# EAGLE board ioboard (EAGLE 9.6.2)
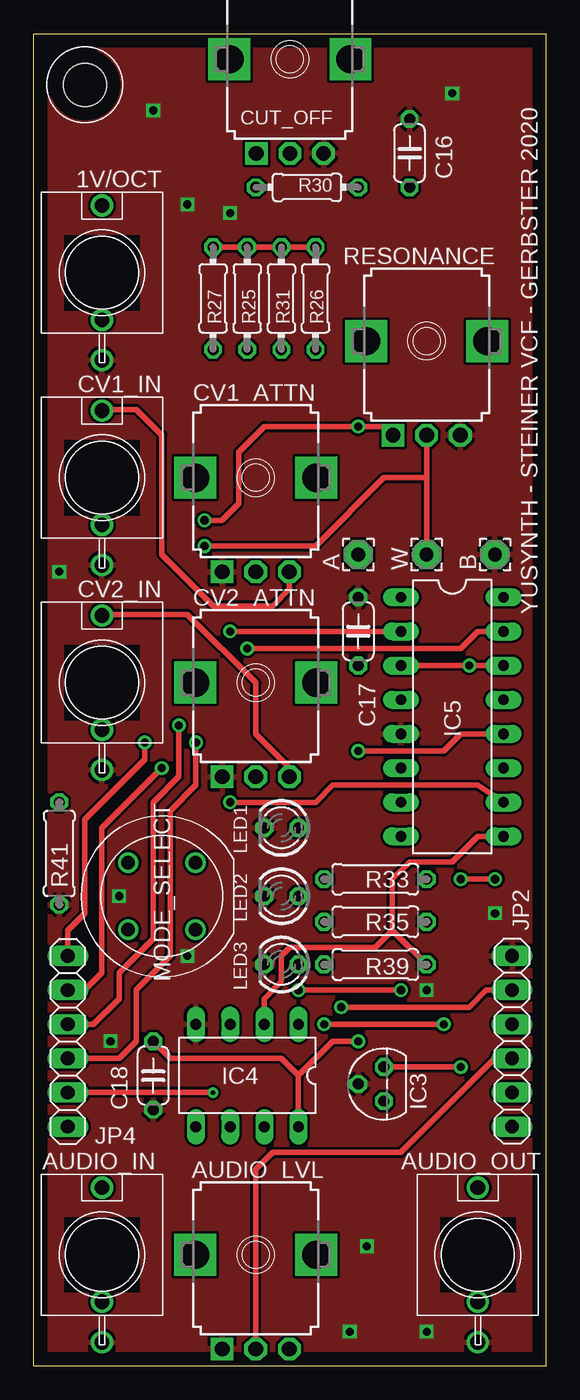
[diagram p0: board, top side]
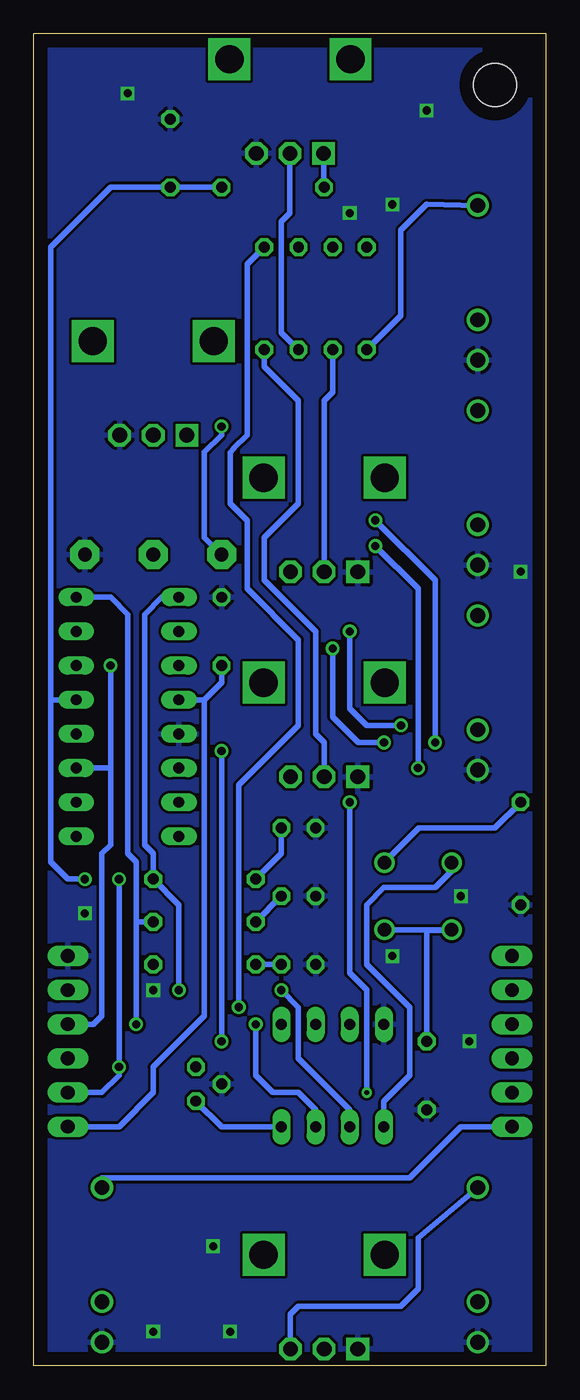
[diagram p1: board, bottom side, seen from below]

Size 38.1 x 99.06 mm. Coordinates in mm from the lower left corner, seen from the top.
Outline: 0,0 0,99.06 38.1,99.06 38.1,0 0,0
Copper layers (1*16): Top 0.035mm / dielectric 1.5mm / Bottom 0.035mm
Design rules "default": minimum track width 10mil, minimum drill 24mil, track to track 8mil, track to pad 8mil, pad to pad 8mil, via to via 8mil, smd to smd 8mil, copper to edge 40mil, drill to drill 8mil, minimum pad ring 10mil, minimum via ring 8mil, stop-mask expansion 4mil, vias tented up to drill 0mil, thermal gap 10mil
Holes 3.2 mm at 3.81,95.25

## Footprints (pad centres in the part's own frame; a part is rotated, then mirrored left to right if it is on the bottom)
WQP-PJ301M-12_JACK = drill 1.1: P$1 0,5; P$2 0,-3.5; P$3 0,-6.5
2,15/1,0 = drill 1.016 pad 2.159 octagon: 1 0,0
EVUF = drill 1.1 pad 1.676 square: 1 -2.5,-7 | drill 1.1 pad 1.676 octagon: 2 0,-7; 3 2.5,-7 | drill 2.1 pad 2.8 square: M1 4.5,0; M2 -4.5,0
C050-024X044 = drill 0.813 octagon: 1 -2.54,0; 2 2.54,0
TO92 = drill 0.813 octagon: 1 -1.27,0; 2 0,1.905; 3 1.27,0
DIL08 = drill 0.813 long: 1 -3.81,-3.81; 2 -1.27,-3.81; 3 1.27,-3.81; 4 3.81,-3.81; 5 3.81,3.81; 6 1.27,3.81; 7 -1.27,3.81; 8 -3.81,3.81
DIL16 = drill 0.813 long: 1 -8.89,-3.81; 2 -6.35,-3.81; 3 -3.81,-3.81; 4 -1.27,-3.81; 5 1.27,-3.81; 6 3.81,-3.81; 7 6.35,-3.81; 8 8.89,-3.81; 9 8.89,3.81; 10 6.35,3.81; 11 3.81,3.81; 12 1.27,3.81; 13 -1.27,3.81; 14 -3.81,3.81; 15 -6.35,3.81; 16 -8.89,3.81
1X06 = drill 1.016 long: 1 -6.35,0; 2 -3.81,0; 3 -1.27,0; 4 1.27,0; 5 3.81,0; 6 6.35,0
LED3MM = drill 0.813 octagon: A -1.27,0; K 1.27,0
D6-BTN = drill 1: A1 -2.5,2.5; A2 -2.5,-2.5; B1 2.5,2.5; B2 2.5,-2.5
0204/7 = drill 0.813 octagon: 1 -3.81,0; 2 3.81,0
0207/7 = drill 0.813 octagon: 1 -3.81,0; 2 3.81,0

## Placement (x,y rotation side)
1V/OCT  [WQP-PJ301M-12_JACK]  5.08,81.28 0 top
A  [2,15/1,0]  24.13,60.33 90 top
AUDIO_IN  [WQP-PJ301M-12_JACK]  5.08,8.26 0 top
AUDIO_LVL  50k log  [EVUF]  16.51,8.26 0 top
AUDIO_OUT  [WQP-PJ301M-12_JACK]  33.02,8.26 0 top
B  [2,15/1,0]  34.29,60.33 90 top
C16  .1uf  [C050-024X044]  27.94,90.17 90 top
C17  .1uf  [C050-024X044]  24.13,54.61 90 top
C18  .1uf  [C050-024X044]  8.89,21.59 270 top
CUT_OFF  50k lin  [EVUF]  19.05,97.16 0 top
CV1_ATTN  50k lin  [EVUF]  16.51,66.04 0 top
CV1_IN  [WQP-PJ301M-12_JACK]  5.08,66.04 0 top
CV2_ATTN  50k lin  [EVUF]  16.51,50.8 0 top
CV2_IN  [WQP-PJ301M-12_JACK]  5.08,50.8 0 top
IC3  78L05Z  [TO92]  26.04,20.95 90 top
IC4  TINY22P  [DIL08]  15.88,21.59 180 top
IC5  ADG412N  [DIL16]  31.11,48.26 270 top
JP2  [1X06]  35.56,24.13 270 top
JP4  [1X06]  2.54,24.13 90 top
LED1  [LED3MM]  18.41,40.01 180 top
LED2  [LED3MM]  18.41,34.92 180 top
LED3  [LED3MM]  18.41,29.84 180 top
MODE_SELECT  D6-BTN  [D6-BTN]  9.53,34.92 90 top
R25  220k  [0204/7]  15.88,79.38 270 top
R26  220k  [0204/7]  20.95,79.38 270 top
R27  220k  [0204/7]  13.34,79.38 270 top
R30  47k  [0204/7]  20.32,87.63 0 top
R31  150k  [0204/7]  18.41,79.38 270 top
R33  560R  [0207/7]  25.4,36.2 0 top
R35  560R  [0207/7]  25.4,33.02 0 top
R39  560R  [0207/7]  25.4,29.84 0 top
R41  10k  [0207/7]  1.91,38.1 90 top
RESONANCE  100k lin  [EVUF]  29.21,76.2 0 top
W  [2,15/1,0]  29.21,60.33 90 top

## Library data of the parts
1V/OCT AUDIO_IN AUDIO_OUT CV1_IN CV2_IN = thonkiconn
A B W = wirepad
AUDIO_LVL CUT_OFF CV1_ATTN CV2_ATTN RESONANCE = TomW
C16-C18 R25-R27 R30 R31 R33 R35 R39 R41 = resistor
IC3 = linear
IC4 = avr-7
IC5 = analog-devices; MF: ALTERA CORPORATION; MPN: ADG412TQ; OC_FARNELL: 1438704; OC_NEWARK: 09B7025
JP2 JP4 = pinhead
LED1-LED3 = led
MODE_SELECT = gerbster

## Nets
+12V: C16.1 IC3.3 IC5.13 JP2.5 R30.2
-12V: C17.1 IC5.4 JP2.6
GND: 1V/OCT.P$3 AUDIO_IN.P$3 AUDIO_LVL.1 AUDIO_OUT.P$3 B.1 C16.2 C17.2 C18.2 CUT_OFF.3 CV1_ATTN.1 CV1_IN.P$3 CV2_ATTN.1 CV2_IN.P$3 IC3.2 IC4.4 IC5.5 JP2.1 LED1.K LED2.K LED3.K R41.1 RESONANCE.3
IO_A: IC4.6 IC5.1 R33.2
IO_AUDIO_IN: AUDIO_LVL.2 JP2.4
IO_AUDIO_OUT: AUDIO_OUT.P$1 JP4.1
IO_B: IC4.7 IC5.16 R35.2
IO_BP_IN: IC5.15 JP4.3
IO_CV_IN: JP2.2 R25.1 R26.1 R27.1 R31.1
IO_HP_IN: IC5.10 JP4.2
IO_LP_IN: IC5.2 JP4.4
IO_RES_A: A.1 JP4.6 RESONANCE.1
IO_RES_B: JP4.5 RESONANCE.2 W.1
IO_SELECT_IN: IC5.3 IC5.11 IC5.14 JP2.3
N$31: MODE_SELECT.B2 R41.2
N$32: C18.1 IC3.1 IC4.8 IC5.12 MODE_SELECT.A1 MODE_SELECT.A2
N$33: IC4.2 IC5.9 R39.2
N$36: AUDIO_IN.P$1 AUDIO_LVL.3
N$37: LED1.A R33.1
N$38: CV1_ATTN.2 R25.2
N$39: CV2_ATTN.2 R26.2
N$40: CV1_ATTN.3 CV1_IN.P$1
N$42: LED2.A R35.1
N$44: LED3.A R39.1
N$45: CV2_ATTN.3 CV2_IN.P$1
N$46: IC4.5 MODE_SELECT.B1
N$54: CUT_OFF.1 R30.1
N$55: 1V/OCT.P$1 R27.2
N$56: CUT_OFF.2 R31.2

## Tracks (layer width: path | path; a pad name or v marks a point on that pad's centre or on a via)
+12V  (via drill 0.61)
  Top 0.406: v34.29,36.2 v31.75,36.2 | IC3.3 v31.75,22.23
  Bottom 0.406: R30.2 C16.1 32.38,87.63 36.83,83.19 36.83,49.53 | 36.83,49.53 36.83,37.47 35.56,36.2 v34.29,36.2 | v31.75,36.2 v31.75,22.23 31.75,21.59 33.02,20.32 JP2.5 | IC5.13 36.83,49.53
-12V
  Bottom 0.406: IC5.4 25.4,49.53 | 25.4,49.53 25.4,26.04 29.21,22.23 29.21,20.32 31.75,17.78 JP2.6 | C17.1 24.13,50.8 25.4,49.53
GND  (via drill 0.6)
  other vias: 34.29,33.66 24.77,8.89 29.21,27.94 29.21,2.54 11.43,30.48 5.71,24.13 6.35,34.92 31.11,94.61 8.89,93.34 11.43,86.36 14.61,85.72 1.91,59.05 23.5,2.54
  pour Bottom: 0,0 38.1,0 38.1,99.06 0,99.06
  pour Top: 0,0 38.1,0 38.1,99.06 0,99.06
IO_A  (via drill 0.61)
  Top 0.406: v27.3,27.94 v19.68,27.94
  Bottom 0.406: v27.3,27.94 27.3,34.29 R33.2 29.21,38.1 29.84,38.73 29.84,55.88 28.57,57.15 IC5.1 | v19.68,27.94 18.41,26.67 18.41,22.86 14.61,19.05 IC4.6
IO_AUDIO_IN
  Top 0.406: AUDIO_LVL.2 16.51,14.61 17.78,15.88 27.3,15.88 34.29,22.86 JP2.4
IO_AUDIO_OUT
  Bottom 0.406: AUDIO_OUT.P$1 33.02,13.97 10.16,13.97 6.35,17.78 JP4.1
IO_B  (via drill 0.61)
  Top 0.406: v21.59,25.4 v30.48,25.4
  Bottom 0.406: IC4.7 17.14,19.05 18.41,20.32 20.32,20.32 21.59,21.59 v21.59,25.4 | v30.48,25.4 30.48,33.02 | 30.48,33.02 30.48,37.47 31.11,38.1 31.11,55.88 32.38,57.15 IC5.16 | 30.48,33.02 R35.2
IO_BP_IN  (via drill 0.61)
  Top 0.406: JP4.3 6.35,22.86 7.62,24.13 7.62,27.94 10.16,30.48 10.16,41.27 12.06,43.18 v12.06,46.35 | v15.88,53.34 31.75,53.34 33.02,54.61 IC5.15
  Bottom 0.406: v12.06,46.35 13.97,46.35 15.88,48.26 v15.88,53.34
IO_CV_IN  (via drill 0.61)
  Top 0.406: R27.1 R25.1 R31.1 R26.1 | v22.86,26.67 32.38,26.67 33.66,27.94 JP2.2
  Bottom 0.406: R26.1 22.23,81.92 22.23,69.22 23.22,68.22 23.22,68.2 23.5,67.92 23.5,64.14 22.23,62.87 22.23,57.78 18.41,53.98 18.41,47.62 22.86,43.18 v22.86,26.67
IO_HP_IN  (via drill 0.35, 0.61)
  Top 0.406: v13.34,20.32 JP4.2 | v14.61,41.91 20.95,41.91 22.23,43.18 33.02,43.18 IC5.10
  Bottom 0.406: v13.34,20.32 13.34,27.94 14.61,29.21 v14.61,41.91
IO_LP_IN  (via drill 0.61)
  Top 0.406: JP4.4 4.45,25.4 6.35,27.3 6.35,29.21 8.89,31.75 8.89,41.91 10.79,43.81 v10.79,47.62 | IC5.2 v14.61,54.61
  Bottom 0.406: v10.79,47.62 13.34,47.62 14.61,48.9 v14.61,54.61
IO_RES_A  (via drill 0.61)
  Top 0.406: RESONANCE.1 26.04,69.85 v24.13,69.85 17.14,69.85 15.24,67.94 15.24,64.14 13.97,62.87 v12.7,62.87 | JP4.6 2.54,32.38 3.81,33.66 3.81,40.64 8.26,45.09 v8.26,46.35
  Bottom 0.406: v8.26,46.35 8.26,58.42 v12.7,62.87 | A.1 25.4,61.59 25.4,67.94 24.13,69.22 v24.13,69.85
IO_RES_B  (via drill 0.61)
  Top 0.406: 29.21,66.04 RESONANCE.2 | JP4.5 3.81,27.94 5.08,29.21 5.08,40.01 v9.53,44.45 | v12.7,60.96 20.95,60.96 26.04,66.04 29.21,66.04 | W.1 29.21,66.04
  Bottom 0.406: v9.53,44.45 9.53,57.78 v12.7,60.96
IO_SELECT_IN  (via drill 0.61)
  Top 0.406: IC5.14 v32.38,52.07 IC5.3
  Bottom 0.406: IC5.11 32.38,44.45 | 32.38,44.45 v32.38,52.07 | 32.38,44.45 32.38,38.73 33.02,38.1 33.02,26.04 33.66,25.4 JP2.3
N$31
  Bottom 0.406: MODE_SELECT.B2 9.48,40.01 3.81,40.01 R41.2
N$32  (via drill 0.61)
  Top 0.406: IC4.8 19.68,21.59 | 19.68,21.59 18.41,22.86 10.16,22.86 C18.1 | IC5.12 31.75,46.99 30.48,45.72 v24.13,45.72 | 19.68,21.59 22.23,24.13 v24.13,24.13
  Bottom 0.406: IC3.1 24.13,17.78 IC4.8 | MODE_SELECT.A2 MODE_SELECT.A1 6.99,32.38 8.89,32.38 C18.1 | v24.13,45.72 v24.13,24.13
N$33
  Top 0.406: IC4.2 17.14,27.3 18.41,28.57 18.41,30.48 19.05,31.11 25.4,31.11 26.67,32.38 | R39.2 26.67,32.38 | 26.67,32.38 26.67,36.2 27.94,37.47 31.11,37.47 33.02,39.37 IC5.9
N$36
  Bottom 0.406: AUDIO_IN.P$1 9.53,9.53 9.53,5.71 10.79,4.45 18.41,4.45 19.01,3.85 AUDIO_LVL.3
N$37
  Bottom 0.406: LED1.A 19.68,38.1 R33.1
N$38
  Bottom 0.406: CV1_ATTN.2 16.51,71.75 15.88,72.39 R25.2
N$39
  Bottom 0.406: CV2_ATTN.2 16.51,46.35 17.14,46.99 17.14,54.61 20.95,58.42 20.95,61.59 18.41,64.14 18.41,71.75 20.95,74.3 R26.2
N$40
  Top 0.406: CV1_ATTN.3 19.01,57.83 19.05,57.78 17.78,56.52 13.34,56.52 9.53,60.33 9.53,69.22 7.62,71.12 5.16,71.12 CV1_IN.P$1
N$42
  Bottom 0.406: LED2.A R35.1
N$44
  Bottom 0.406: LED3.A R39.1
N$45
  Top 0.406: CV2_ATTN.3 19.01,44.49 16.51,46.99 16.51,50.8 11.43,55.88 5.16,55.88 CV2_IN.P$1
N$46
  Bottom 0.406: IC4.5 12.06,19.68 10.16,21.59 10.16,26.67 13.34,29.84 13.34,34.29 12.06,35.56 8.26,35.56 6.99,36.83 6.99,37.42 MODE_SELECT.B1
N$54
  Bottom 0.406: CUT_OFF.1 16.55,87.63 R30.1
N$55
  Bottom 0.406: 1V/OCT.P$1 8.89,86.36 10.79,84.45 10.79,78.11 R27.2
N$56
  Bottom 0.406: CUT_OFF.2 19.05,85.72 19.68,85.09 19.68,76.83 R31.2

## Text on the board
tNames: YUSYNTH - STEINER VCF - GERBSTER 2020